# Altium PCB SALO_CONTROLLER_PCB.PcbDoc
Units mil, origin at the board's own origin, x right, y up, seen from the top; angles counter-clockwise.
Board outline 2575 x 1400 mil, 2 copper layers (Top Layer, Bottom Layer); 23 components, 28 nets, 113 pads, 8 vias.
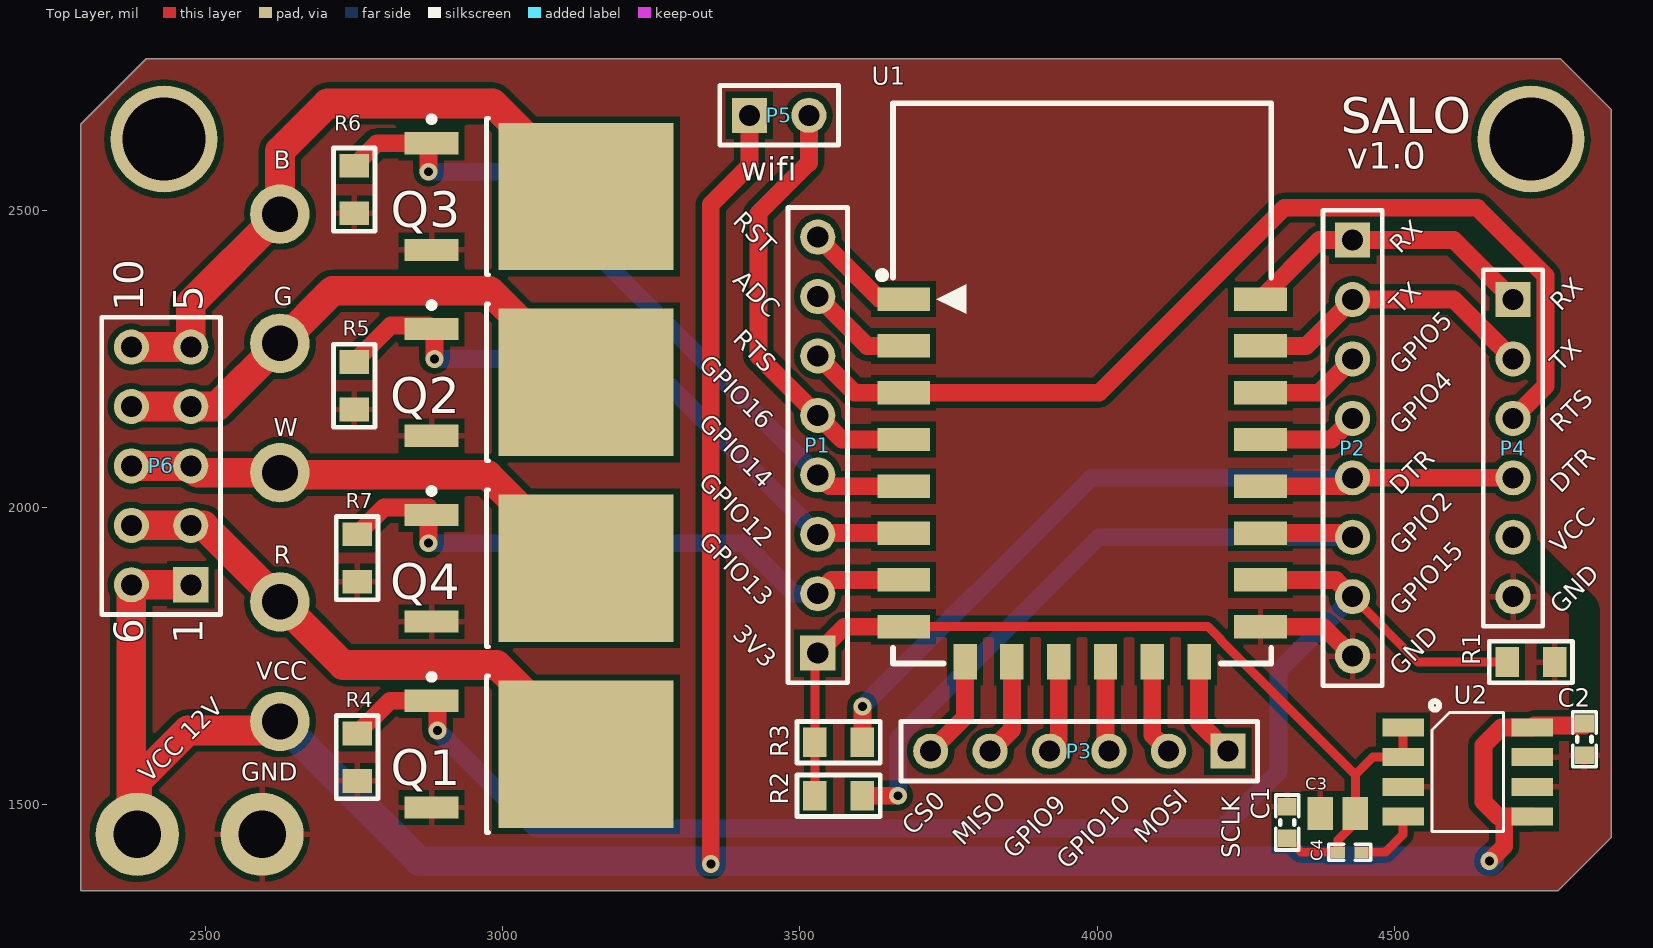
[diagram p0: Top Layer view]
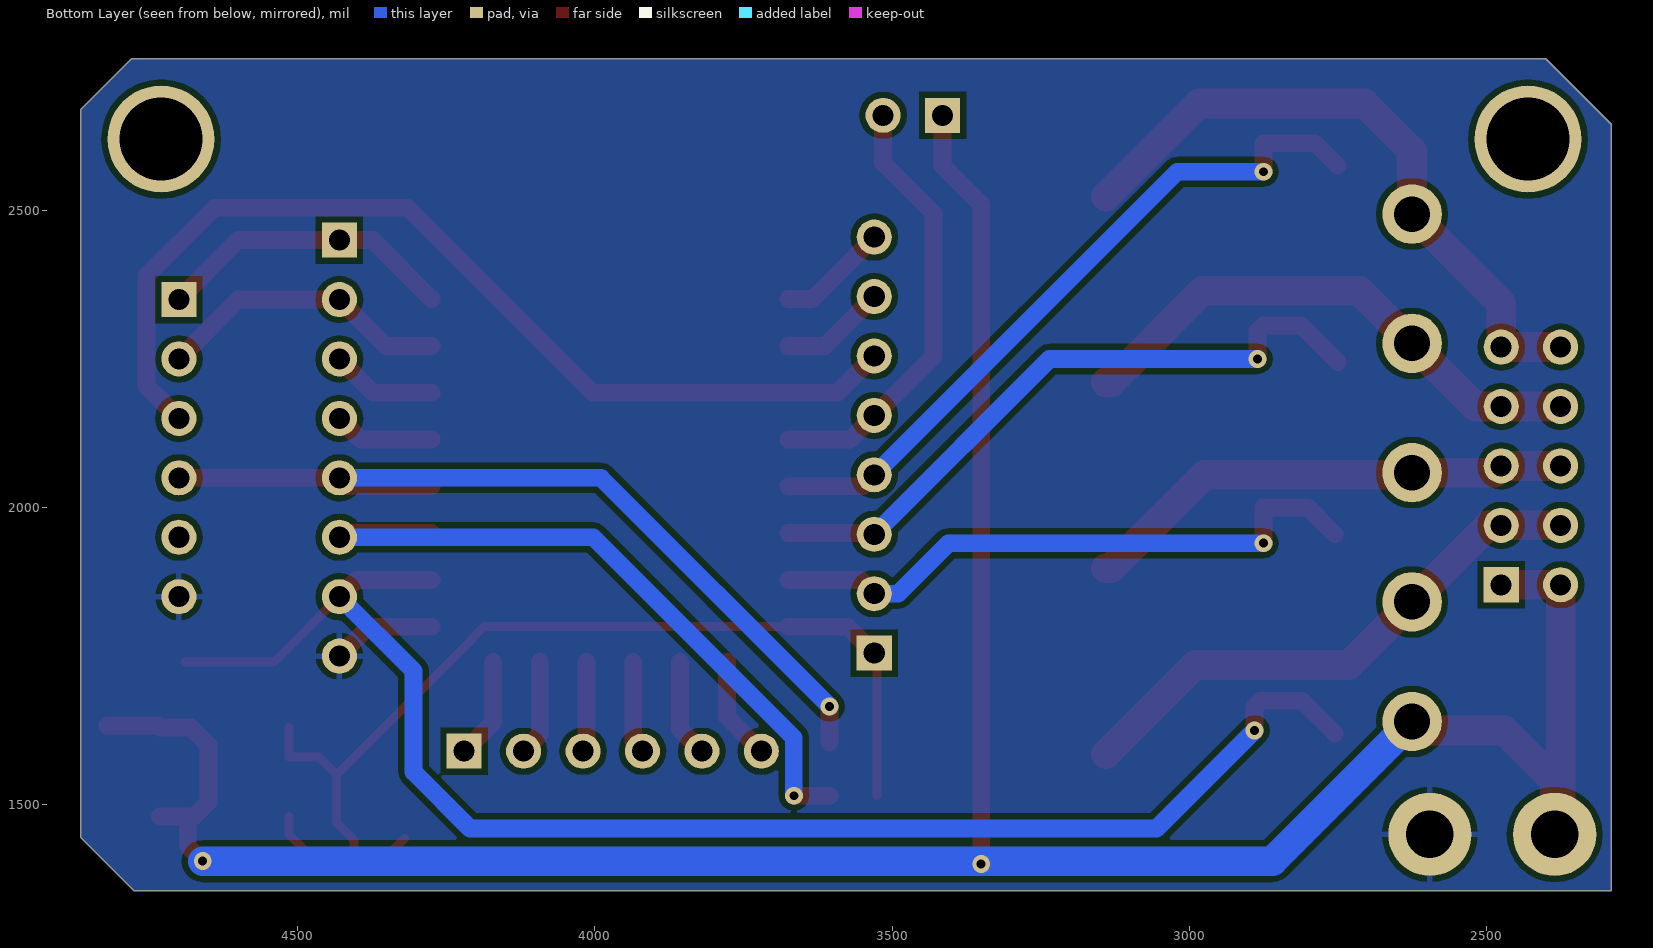
[diagram p1: Bottom Layer view, seen from below]
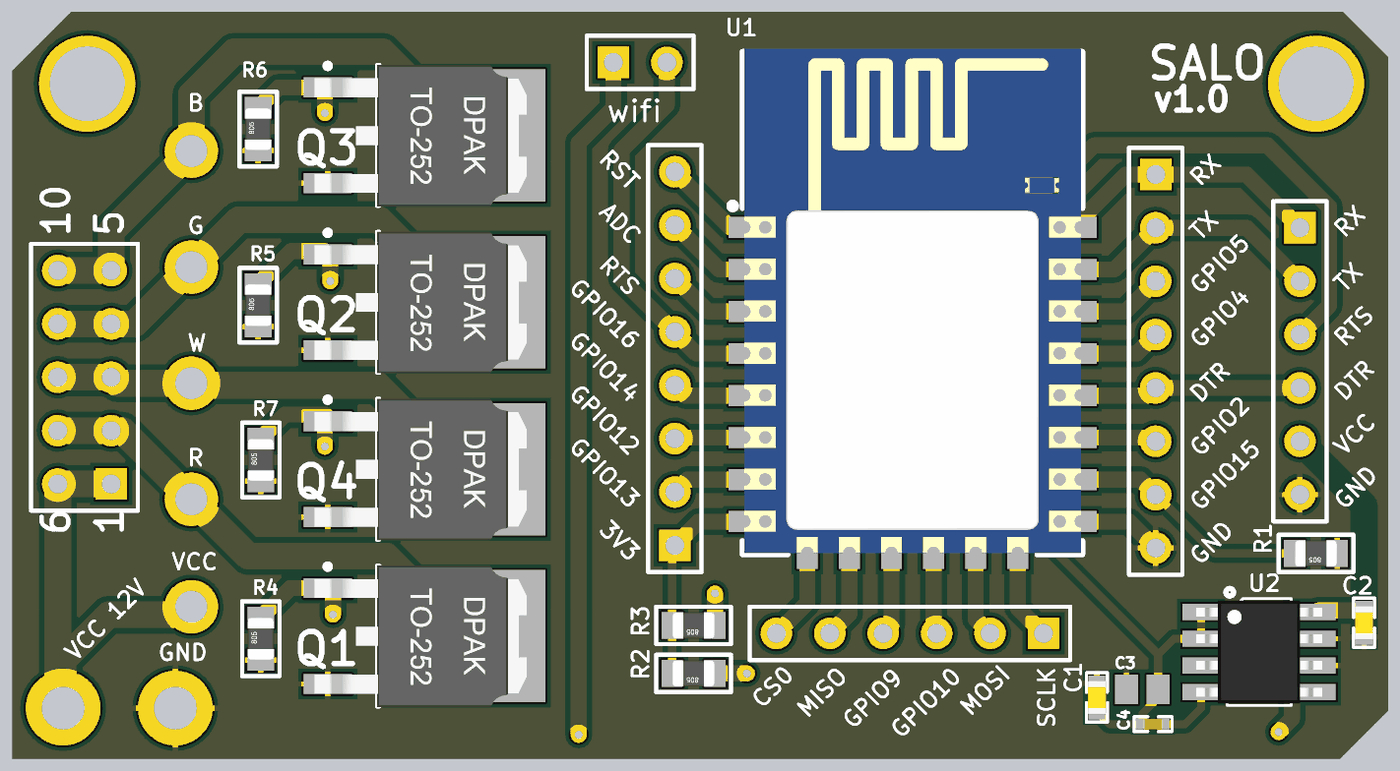
[diagram p2: 3D render of the assembled board from above, using the file's embedded part models]

## Layer stack, top to bottom
Top Solder: solder mask 0.4, Solder Resist, Dk 3.5
Top Layer: signal copper 1.4
Dielectric 1: dielectric 12.6, FR-4, Dk 4.8
Bottom Layer: signal copper 1.4
Bottom Solder: solder mask 0.4, Solder Resist, Dk 3.5

## Board outline
2290,1355 2290,2645 2400,2755 4780,2755 4865,2670 4865,1445 4775,1355

## Design rules (kind name [scope] priority, off if disabled: settings)
Clearance [All] p1: gap=10
PolygonConnect [All] p1: connectstyle=Relief reliefconductorwidth=10 reliefentries=4 polygonreliefangle="90 Angle" airgapwidth=10
RoutingVias [All] p1: holewidth=28 width=50 viastyle="Through Hole" minholewidth=28 minwidth=50 maxholewidth=28 maxwidth=50
SolderMaskExpansion [All] p1: expansion=4
Width [All] p1: maxlimit=50 minlimit=8 preferedwidth=10 minimp=50.000000 maximp=50.000000 favimp=50.000000
30 further rules are at their usual default settings.

## Components (designator, comment, footprint, x,y, rotation, side; value= is the part's Value field where it differs from the comment)
C1 "0.1uF" CAPC1608X06L 4320,1470 r270 top
C2 "1uF" CAPC1608X06L 4820,1610 r90 top
C3 "Cap" C0805 4405,1485 r0 top
C4 "0.01uF" CAPC1005X04L 4425,1420 r180 top
P1 "Header 8" HDR1X8 3530,1755 r90 top
P2 "Header 8" HDR1X8 4430,2450 r270 top
P3 "Header 6" HDR1X6 4220,1590 r180 top
P4 "Header 6" HDR1X6 4700,2350 r270 top
P5 "Header 2" HDR1X2 3415,2660 r0 top
P6 "Header 5X2A" HDR2X5_CEN 2475,1870 r90 top
Q1 "MOSFET-N" DPAK 3061.26,1585 r0 top
Q2 "MOSFET-N" DPAK 3061.26,2210.56 r0 top
Q3 "MOSFET-N" DPAK 3061.26,2523.33 r0 top
Q4 "MOSFET-N" DPAK 3061.26,1897.78 r0 top
R1 "Res1" R0805 4730,1740 r180 top
R2 "Res1" R0805 3565,1515 r180 top
R3 "Res1" R0805 3565,1605 r180 top
R4 "Res1" R0805 2755,1580 r90 top
R5 "Res1" R0805 2750,2205 r90 top
R6 "Res1" R0805 2750,2535 r90 top
R7 "Res1" R0805 2755,1915 r90 top
U1 "ESP_12_E" ESP_12_E 3659.84,2350.67 r0 top
U2 "LT1763CS8" SOIC8 4608.5,1430 r270 top

## Footprints (in the part's own frame and the unit in brackets; to place one, negate y for a bottom-side part, rotate by r counter-clockwise, add the part's x,y. Pads: shape width x height; smd on the part's side, far side on the other; paste and mask are expansions set on the pad)
C0805 [mm] "Chip Capacitor, Body 2.0x1.3mm, IPC High Density"
  rect 1.1x1.4 smd: 1(-0.75,0) 2(0.75,0)
  body extent -1.1,-0.72 1.1,0.72, height 1.4
CAPC1005X04L [mm]
  rect 0.6x0.5 smd: 1(-0.5,0) 2(0.5,0)
  silkscreen extent -0.9,-0.35 0.9,0.35, body extent -0.51,-0.25 0.51,0.25, height 0.5
CAPC1608X06L [mm]
  rect 0.75x0.8 smd: 1(-0.675,0) 2(0.675,0)
  silkscreen extent -1.18,-0.5 1.17,0.5, body extent -0.8,-0.43 0.8,0.43, height 0.8
DPAK [mm] "D-PAK, 3-Pads, Body 6.20x6.72mm (max), IPC Medium Density"
  rect 7.5x6.3 smd: 1(2,0)
  rect 2.3x0.95 smd: 2(-4.6,2.28) 3(-4.6,-2.28)
  silkscreen extent -4.72,-3.35 -2.15,3.43, body extent -5.24,-3.38 4.86,3.35, height 2.37
ESP_12_E [mm] "ESP-12 Wi-Fi Module by AI-Thinker"
  rect 2.25x1 smd: 1(0.375,0) 2(0.375,-2) 3(0.375,-4) 4(0.375,-6) 5(0.375,-8) 6(0.375,-10) 7(0.375,-12) 8(0.375,-14) 15(15.625,-14) 16(15.625,-12) 17(15.625,-10) 18(15.625,-8) 19(15.625,-6) 20(15.625,-4) 21(15.625,-2) 22(15.625,0)
  rect 1x1.5 smd: 9(3,-15.5) 10(5,-15.5) 11(7,-15.5) 12(9,-15.5) 13(11,-15.5) 14(13,-15.5)
  silkscreen extent -0.7,-15.57 16.08,8.37, body extent 0,-15.49 16,8.51, height 2.75
HDR1X2 [mm] "Connector; Header; 2 Position"
  rect 1.5x1.5 hole 0.9: 1(0,0)
  round 1.5 hole 0.9: 2(2.54,0)
  silkscreen extent -1.27,-1.27 3.81,1.27
HDR1X6 [mm] "Connector; Header; 6 Position"
  rect 1.5x1.5 hole 0.9: 1(0,0)
  round 1.5 hole 0.9: 2(2.54,0) 3(5.08,0) 4(7.62,0) 5(10.16,0) 6(12.7,0)
  silkscreen extent -1.27,-1.27 13.97,1.27
HDR1X8 [mm] "Connector; Header; 8 Position"
  rect 1.5x1.5 hole 0.9: 1(0,0)
  round 1.5 hole 0.9: 2(2.54,0) 3(5.08,0) 4(7.62,0) 5(10.16,0) 6(12.7,0) 7(15.24,0) 8(17.78,0)
  silkscreen extent -1.27,-1.27 19.05,1.27
HDR2X5_CEN [mm] "Connector; Header; 5x2 Position"
  rect 1.5x1.5 hole 0.9: 1(0,0)
  round 1.5 hole 0.9: 2(2.54,0) 3(5.08,0) 4(7.62,0) 5(10.16,0) 6(0,2.54) 7(2.54,2.54) 8(5.08,2.54) 9(7.62,2.54) 10(10.16,2.54)
  silkscreen extent -1.27,-1.27 11.43,3.81
R0805 [mil]
  rect 40x50 smd: 1(-40,0) 2(40,0)
  silkscreen extent -70,-35 70,35, body extent -39,-25 39,25, height 31
SOIC8 [mil]
  rect 30x70 smd paste-1000 mask-1000: 1(-200,-93.5) 2(-150,-93.5) 3(-100,-93.5) 4(-50,-93.5) 5(-50,123.5) 6(-100,123.5) 7(-150,123.5) 8(-200,123.5)
  silkscreen extent -244,-47 -25,75, body extent -221,-103 -29,133, height 69

## Part data
C1 C2: library part CAP_0603, "Capacitor, X5R, ±10%"
C3: "Capacitor"
C4: library part CAP_0402, "Capacitor, NP0, ±2%"
P1 P2: "Header, 8-Pin"
P3 P4: "Header, 6-Pin"
P5: "Header, 2-Pin"
P6: "Header, 5-Pin, Dual row"
Q1 Q2 Q3 Q4: "N-Channel MOSFET"
R1 R2 R3 R4 R5 R6 R7: "Resistor"
U1: "ESP-12 Wi-Fi Module by AI-Thinker"

## Free pads (board coordinates)
  round 140 hole 80: 2(2385,1450) 2(2595,1450)
  round 180 hole 140: 2(2430,2620) 2(4730,2620)
  round 100 hole 60: 2(2625,1640) 2(2625,1841.25) 2(2625,2058.75) 2(2625,2276.25) 2(2625,2493.75)

## Via types
v1: diameter 30, hole 15, Top Layer to Bottom Layer, 8 vias

## Nets (pads, with @x,y where several pads share a name; then routed paths per layer and width w, separated by ;. In a path a pad name is that pad's centre, name@x,y a point inside that pad or via, vN(x,y) a via of type N, cw(c..) or ccw(c..) an arc to the next point about the centre after c; other vN are vias at no path point)
3V3: C1.2 C3.2 C4.2 P1.1 R2.2 R3.2 U1.8 U2.1 U2.2 | length 1649.5
  Top Layer w15: R2.2 R3.2 3525,1750 P1.1 ; U1.8 3675.12,1800 4186.05,1800 4208.84,1777.21 4208.84,1776.16 4434.53,1550.47 ; C1.2 4343.43,1420 C4.2 4405.31,1440.31 4434.53,1469.53 C3.2 4434.53,1550.47 ; U2.1 U2.2 4464.06,1580 4434.53,1550.47
  Top Layer w30: P1.1 3574.49,1799.49 U1.8
ADC: P1.7 U1.2 | length 179
  Top Layer w30: P1.7 3613.07,2271.93 U1.2
B: P6.5 P6.10 pad.2@2625,2493.75 Q3.1 | length 1105.2
  Top Layer w50: P6.10 P6.5 2475,2343.75 2625,2493.75 2625,2600 2705,2680 2983.33,2680 Q3.1
BC: P1.4 Q3.2 R6.2 U1.5 | length 1207.9
  Top Layer w30: R6.2 2788.1,2613.1 2875.16,2613.1 2875,2612.94 v1(2875,2565) ; P1.4 3549.29,2035.71 U1.5
  Bottom Layer w30: v1(2875,2565) 3020,2565 P1.4
CS0: P3.6 U1.9 | length 174.4
  Top Layer w30: P3.6 3777.95,1647.95 U1.9
DTR: P2.5 P4.4 R3.1 U1.18 | length 1475.4
  Top Layer w30: R3.1 v1(3605,1665) ; U1.18 4415.71,2035.71 P2.5 P4.4
  Bottom Layer w30: v1(3605,1665) 3990,2050 P2.5
G: P6.4 P6.9 pad.2@2625,2276.25 Q2.1 | length 923.9
  Top Layer w40: pad.2@2605,2277.5 pad.2@2612.5,2270
  Top Layer w50: P6.9 P6.4 2518.75,2170 2625,2276.25 2713.75,2365 2977.18,2365 3131.63,2210.56 Q2.1 ; pad.2@2602.5,2280 pad.2@2605,2277.5
GC: P1.3 Q2.2 R5.2 U1.6 | length 1123.7
  Top Layer w30: R5.2 2811.43,2306.43 2875.16,2306.43 2885,2296.59 v1(2885,2250) ; P1.3 3531.97,1956.97 U1.6
  Bottom Layer w30: v1(2885,2250) 3235,2250 P1.3
GND: C1.1 C2.1 C3.1 P2.8 P4.6 pad.2@2595,1450 Q1.3 Q2.3 Q3.3 Q4.3 R1.1 R4.1 R5.1 R6.1 R7.1 U1.15 U2.3 U2.6 U2.7 | length 175.5
  Top Layer w30: U1.15 4380.51,1799.49 P2.8
GPIO2: P2.6 R2.1 U1.17 | length 1220
  Top Layer w30: R2.1 v1(3665,1515) ; U1.17 4423.03,1956.97 P2.6
  Bottom Layer w30: v1(3665,1515) 3665.47,1515.47 3665.47,1612.59 4002.89,1950 P2.6
GPIO4: P2.4 U1.19 | length 169.7
  Top Layer w30: U1.19 4394.45,2114.45 P2.4
GPIO5: P2.3 U1.20 | length 178.5
  Top Layer w30: U1.20 4373.19,2193.19 P2.3
GPIO9: P3.4 U1.11 | length 156.8
  Top Layer w30: P3.4 3935.43,1605.43 U1.11
GPIO10: P3.3 U1.12 | length 152.8
  Top Layer w30: U1.12 4014.17,1595.83 P3.3
GPIO13: P1.2 Q4.2 R7.2 U1.7 | length 1043.6
  Top Layer w30: R7.2 2800,2000 2875.39,2000 2875,1999.61 v1(2875,1940) ; P1.2 3553.23,1878.23 U1.7
  Bottom Layer w30: v1(2875,1940) 3405,1940 3490,1855 P1.2
GPIO15: P2.7 Q1.2 R1.2 R4.2 U1.16 | length 2543.6
  Top Layer w15: P2.7 4540,1740 R1.2
  Top Layer w30: R4.2 2810,1675 2810.24,1674.76 Q1.2 2890,1664.92 v1(2890,1625) ; U1.16 4401.77,1878.23 P2.7
  Bottom Layer w30: v1(2890,1625) 3055,1460 4210,1460 4305,1555 4305,1725 P2.7
GPIO16: P1.5 P5.2 U1.4 | length 743
  Top Layer w30: P5.2 3515,2580 3430,2495 3430,2255 P1.5 3570.55,2114.45 U1.4
MISO: P3.5 U1.10 | length 165.6
  Top Layer w30: P3.5 3856.69,1626.69 U1.10
MOSI: P3.2 U1.13 | length 161.7
  Top Layer w30: U1.13 4092.91,1617.09 P3.2
NetC4_1: C4.1 U2.4 | length 112.7
  Top Layer w15: C4.1 4485,1420 4515,1450 U2.4
R: P6.2 P6.7 pad.2@2625,1841.25 Q1.1 | length 924.5
  Top Layer w50: P6.7 P6.2 2496.25,1970 2625,1841.25 2731.25,1735 2990,1735 Q1.1
RESET: P1.8 U1.1 | length 187.8
  Top Layer w30: P1.8 3634.33,2350.67 U1.1
RTS: P1.6 P4.3 U1.3 | length 1689
  Top Layer w30: P1.6 3591.81,2193.19 U1.3 4003.54,2193.19 4314.88,2504.53 4639.88,2504.53 4754.53,2389.88 4754.53,2204.53 P4.3
RX: P2.1 P4.1 U1.22 | length 507.6
  Top Layer w30: U1.22 4374.33,2450 P2.1 4600,2450 P4.1
SCLK: P3.1 U1.14 | length 170.5
  Top Layer w30: U1.14 4171.65,1638.35 P3.1
TX: P2.2 P4.2 U1.21 | length 498.8
  Top Layer w30: U1.21 4351.93,2271.93 P2.2 4600,2350 P4.2
VCC: C2.2 P5.1 P6.1 P6.6 pad.2@2385,1450 pad.2@2625,1640 U2.5 U2.8 | length 4771.3
  Top Layer w30: v1(3350,1400) 3350,2510 3415,2575 P5.1 ; v1(4660,1405) 4685,1430 4685,1480 ; U2.5 4675,1480 4650,1505 4650,1600 4680,1630 U2.8 4735.15,1633.15 C2.2@4820,1633.15
  Top Layer w50: P6.1 P6.6 2375,1460 2385,1450 2385,1540 2470,1625 2610,1625 pad.2@2625,1640
  Bottom Layer w50: pad.2@2625,1640 2860,1405 v1(4660,1405)
W: P6.3 P6.8 pad.2@2625,2058.75 Q4.1 | length 836.3
  Top Layer w50: P6.8 P6.3 2486.25,2058.75 2625,2058.75 2628.75,2055 2974.4,2055 3131.63,1897.78 Q4.1
pads on no net: P4.5

## Polygon pours and split planes (outlines as drawn)
GND on Top Layer "Top Layer-No Net1" (solid, pour order 1): 2290,1355 2290,2645 2400,2755 4780,2755 4865,2670 4865,1445 4775,1355
GND on Top Layer "Top Layer-No Net" (solid, pour order 0): 2290,1355 2290,2645 2400,2755 4780,2755 4865,2670 4865,1445 4775,1355
GND on Bottom Layer "Top Layer-No Net2" (solid, pour order 2): 2290,1355 2290,2645 2400,2755 4780,2755 4865,2670 4865,1445 4775,1355

## Silkscreen, mask and mechanical layers (free items; w line width, h text height)
Top Overlay:
  text "SALO" at 4410,2630 h60
  text "B" at 2615,2570 h30
  text "v1.0" at 4420,2570 h45
  text "wifi" at 3400,2550 h40
  text "RST" at 3384.88,2480 h30 r315
  text "RX" at 4510,2425 h30 r45
  text "ADC" at 3384.88,2380.71 h30 r315
  text "G" at 2615,2340 h30
  text "RX" at 4780,2328.57 h30 r45
  text "TX" at 4510,2323.57 h30 r45
  text "RTS" at 3384.88,2281.43 h30 r315
  text "GPIO16" at 3328.33,2238.69 h30 r315
  text "TX" at 4780,2226.57 h30 r45
  text "GPIO5" at 4510,2222.14 h30 r45
  text "GPIO14" at 3328.33,2139.41 h30 r315
  text "RTS" at 4780,2124.57 h30 r45
  text "GPIO4" at 4510,2120.71 h30 r45
  text "W" at 2615,2120 h30
  text "GPIO12" at 3328.33,2040.12 h30 r315
  text "DTR" at 4780,2022.57 h30 r45
  text "DTR" at 4510,2019.29 h30 r45
  text "GPIO13" at 3328.33,1940.84 h30 r315
  text "VCC" at 4780,1920.57 h30 r45
  text "GPIO2" at 4510,1917.86 h30 r45
  text "R" at 2615,1905 h30
  text "GND" at 4780,1818.57 h30 r45
  text "GPIO15" at 4510,1816.43 h30 r45
  text "3V3" at 3384.88,1785 h30 r315
  text "GND" at 4510,1715 h30 r45
  text "VCC" at 2585,1710 h30
  text "GND" at 2560,1540 h30
  text "VCC 12V" at 2405,1535 h30 r45
  text "CS0" at 3690,1446.55 h30 r45
  text "MOSI" at 4080,1432.41 h30 r45
  text "MISO" at 3775,1428.88 h30 r45
  text "SCLK" at 4240,1410 h30 r90
  text "GPIO9" at 3860,1407.67 h30 r45
  text "GPIO10" at 3950,1390 h30 r45
Mechanical 1:
  lines w19.68: 2290,1355 2290,2645 2400,2755 4780,2755 4865,2670 4865,2660 4865,1445 4775,1355 2290,1355

## Text inside footprints (layer, text, board x,y; h text height)
P6: Top Overlay "6" at 2395,1770 h50 r90; Top Overlay "10" at 2395,2330 h50 r90; Top Overlay "5" at 2495,2330 h50 r90; Top Overlay "1" at 2495,1770 h50 r90
U1: Mechanical 13 "CUTOUT POLYGON" at 3664.84,2640.67 h10; Mechanical 13 "ANTENNA AREA" at 3664.84,2660.67 h10